# Altium PCB PCB1.pcbdoc
Units mil, origin at the board's own origin, x right, y up, seen from the top; angles counter-clockwise.
Board outline 5600 x 5600 mil, 2 copper layers (Top Layer, Bottom Layer); 53 components, 12 nets, 125 pads, 10 vias.
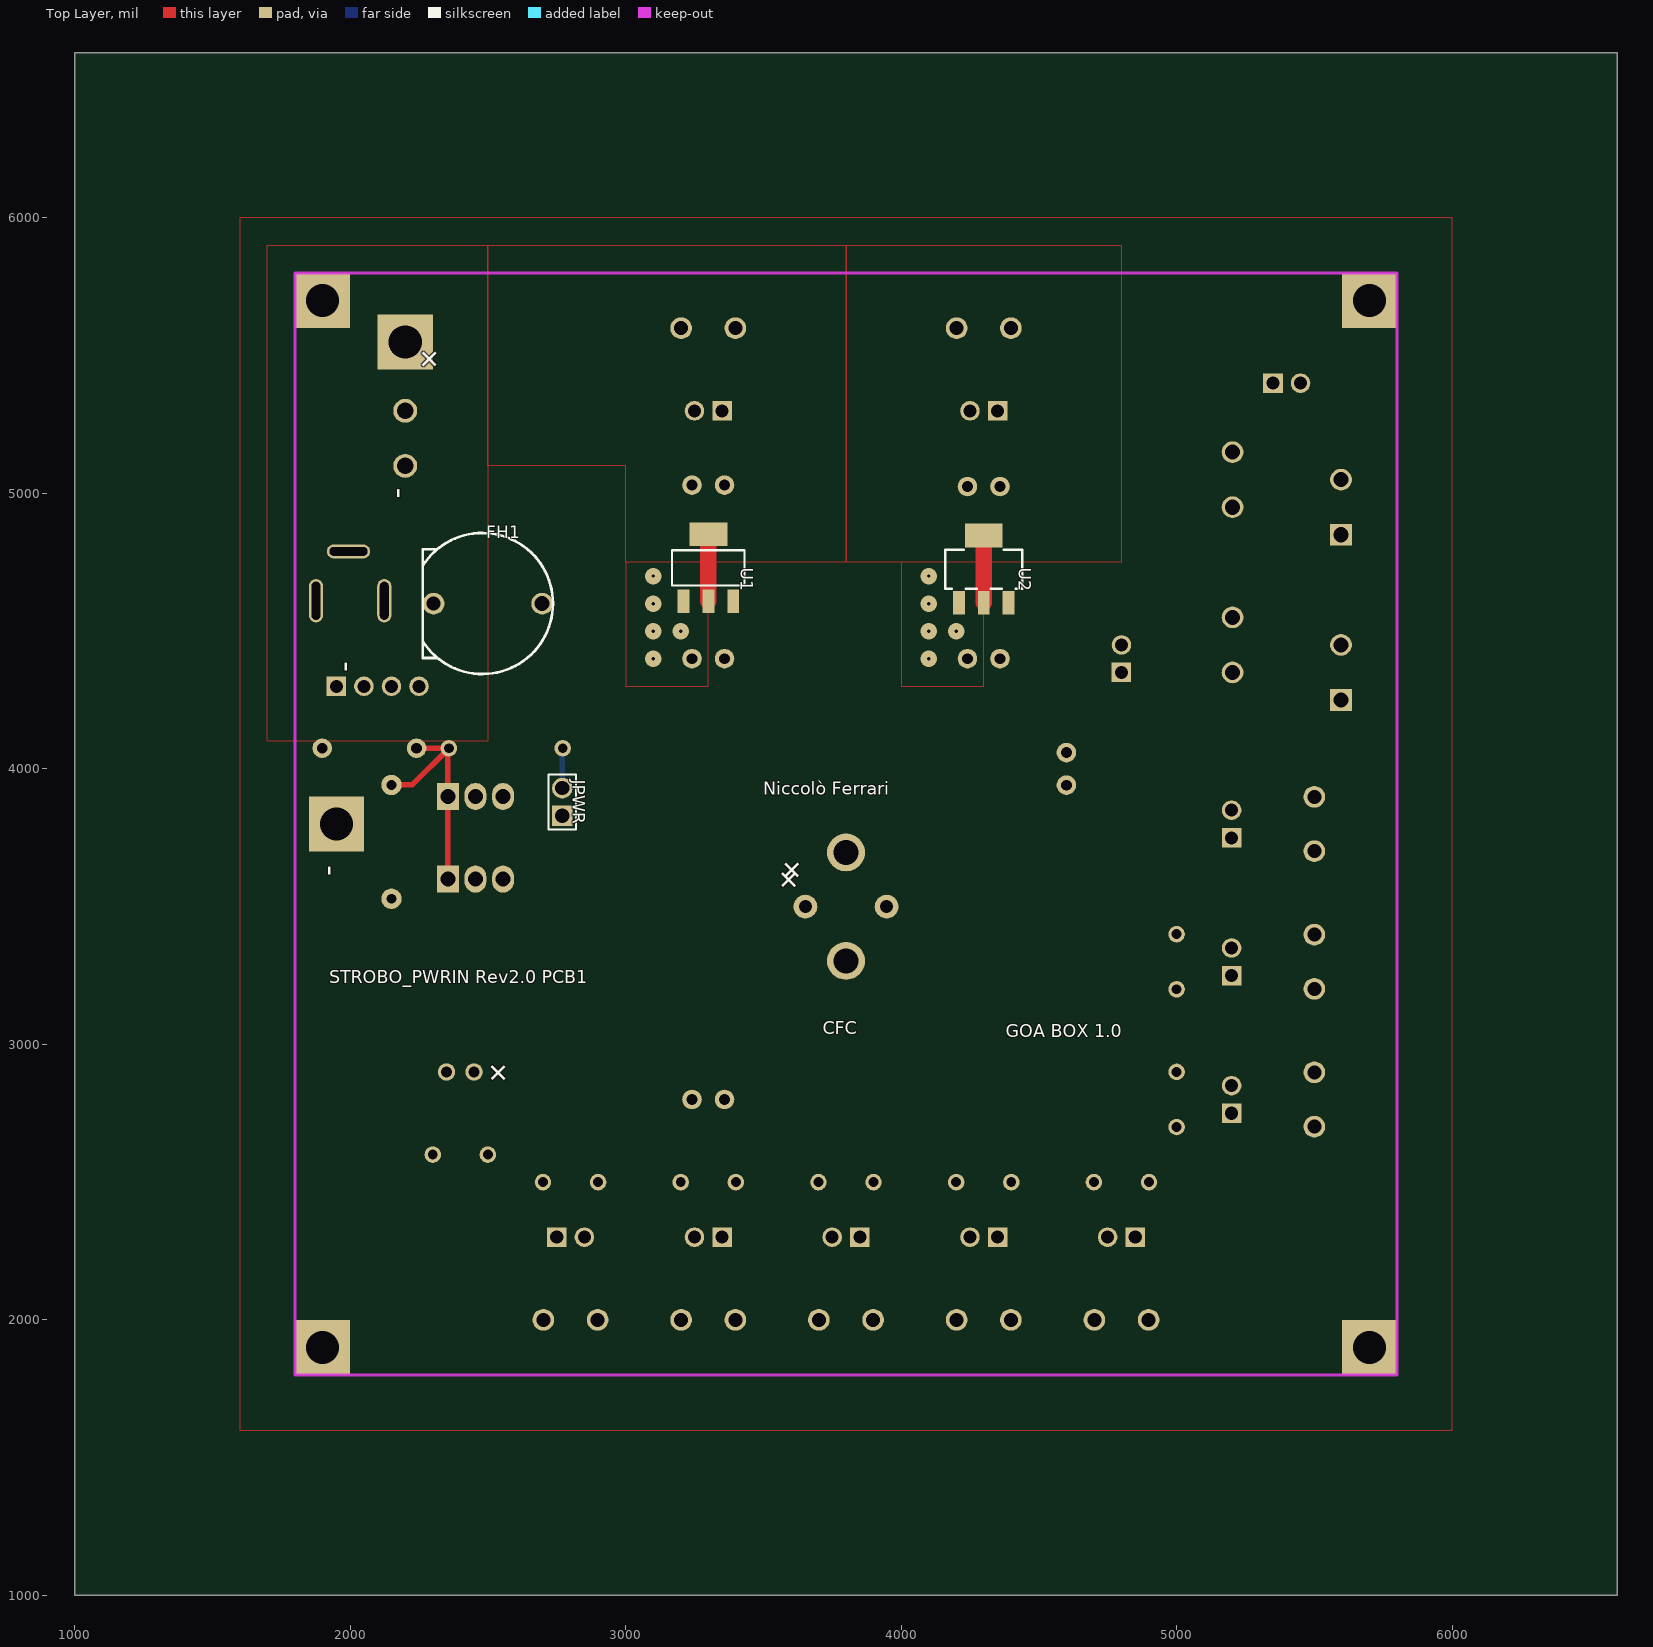
[diagram p0: Top Layer view]
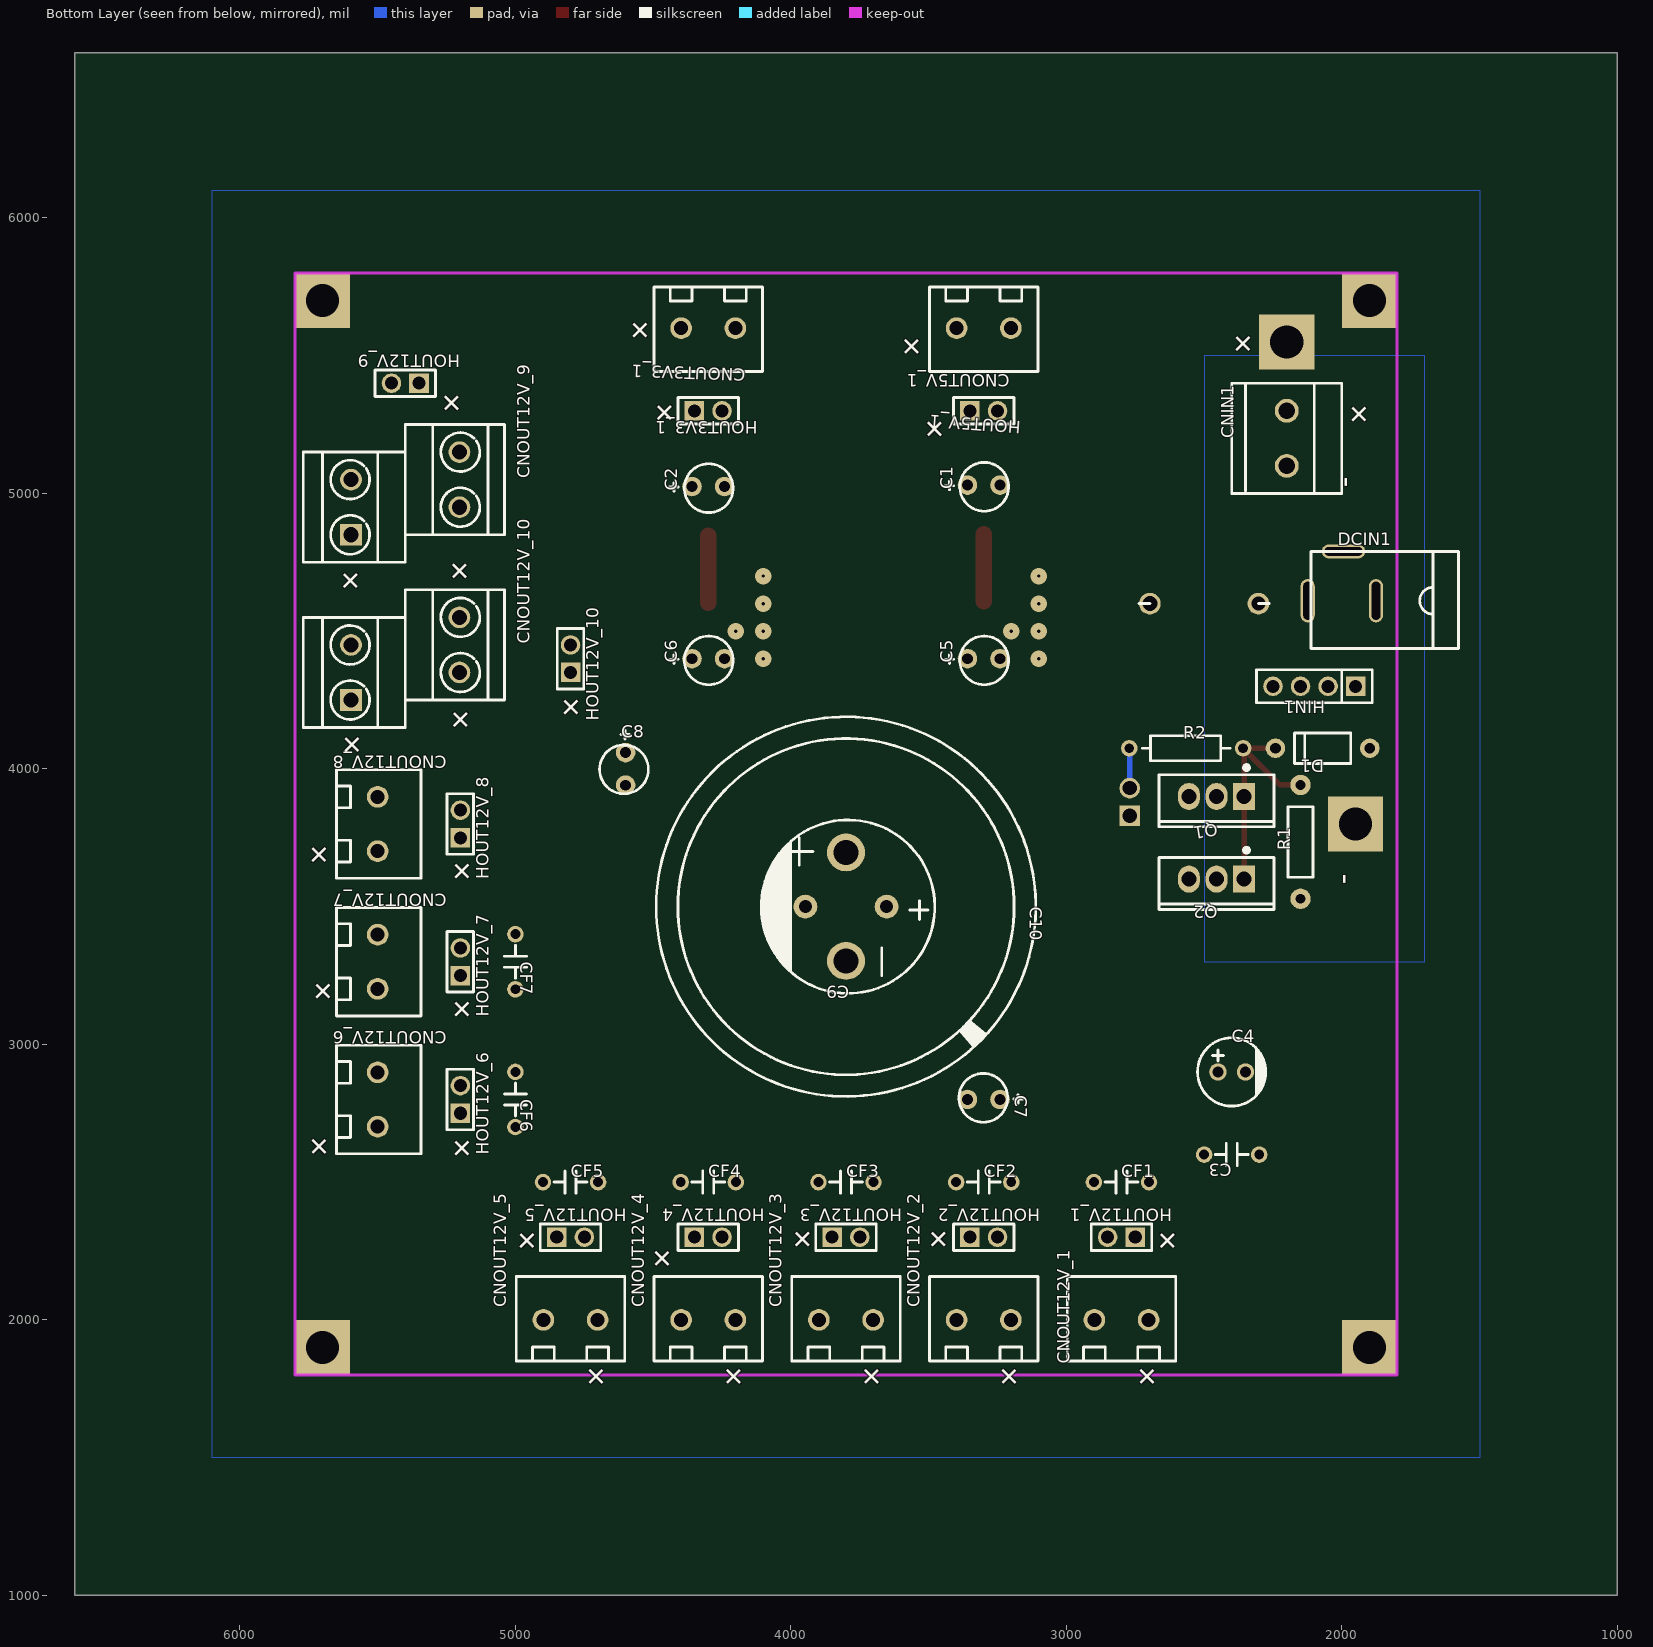
[diagram p1: Bottom Layer view, seen from below]

## Layer stack, top to bottom
Top Layer: signal copper (thickness not stored)
Dielectric: dielectric 12.6, FR-4, Dk 4.8
Bottom Layer: signal copper (thickness not stored)

## Board outline
6600,1000 1000,1000 1000,6600 6600,6600

## Components (designator, comment, footprint, x,y, rotation, side; value= is the part's Value field where it differs from the comment)
C1 "10uF" CAP-TAN-S2.5 3300,5030 r270 bottom
C2 "10uF" CAP-TAN-S2.5 4300,5025 r270 bottom
C3 "2.2uF" CAP-0.2 2400,2600 r180 bottom
C4 "100uF" CAP-TH_BD6.3-P2.50-D1.0-FD 2400,2900 r0 bottom
C5 "10uF" CAP-TAN-S2.5 3300,4400 r270 bottom
C6 "10uF" CAP-TAN-S2.5 4300,4400 r270 bottom
C7 "10uF" CAP-TAN-S2.5 3300,2800 r90 bottom
C8 "10uF" CAP-TAN-S2.5 4600,4000 r0 bottom
C9 "4700uF" CAP-TH_BD16.0-P7.50-D1.2-FD 3800,3500 r180 bottom
C10 "22000uF" CAP-TH_BD35.0-P10.00-D2.3-FD 3800,3500 r90 bottom
CF1 "1uF" CAP-0.2 2800,2500 r0 bottom
CF2 "1uF" CAP-0.2 3300,2500 r0 bottom
CF3 "1uF" CAP-0.2 3800,2500 r0 bottom
CF4 "1uF" CAP-0.2 4300,2500 r0 bottom
CF5 "1uF" CAP-0.2 4800,2500 r0 bottom
CF6 "1uF" CAP-0.2 5000,2800 r90 bottom
CF7 "1uF" CAP-0.2 5000,3300 r90 bottom
CNIN1 "MKDSN1.5/2-5.08" MKDSN1.5/2-5.08 2200,5200 r270 bottom
CNOUT3V3_1 "WJ126V-5.0-2P" WJ126V-5.0-2P 4300,5600 r90 bottom
CNOUT5V_1 "WJ126V-5.0-2P" WJ126V-5.0-2P 3300,5600 r90 bottom
CNOUT12V_1 "WJ126V-5.0-2P" WJ126V-5.0-2P 2800,2000 r270 bottom
CNOUT12V_2 "WJ126V-5.0-2P" WJ126V-5.0-2P 3300,2000 r270 bottom
CNOUT12V_3 "WJ126V-5.0-2P" WJ126V-5.0-2P 3800,2000 r270 bottom
CNOUT12V_4 "WJ126V-5.0-2P" WJ126V-5.0-2P 4300,2000 r270 bottom
CNOUT12V_5 "WJ126V-5.0-2P" WJ126V-5.0-2P 4800,2000 r270 bottom
CNOUT12V_6 "WJ126V-5.0-2P" WJ126V-5.0-2P 5500,2800 r0 bottom
CNOUT12V_7 "WJ126V-5.0-2P" WJ126V-5.0-2P 5500,3300 r0 bottom
CNOUT12V_8 "WJ126V-5.0-2P" WJ126V-5.0-2P 5500,3800 r0 bottom
CNOUT12V_9 "EELK508V-04P" EELK508V-04P 5400,5000 r270 bottom
CNOUT12V_10 "EELK508V-04P" EELK508V-04P 5400,4400 r270 bottom
D1 "TC1N4742ATB" DO-41_BD2.4-L4.7-P8.70-D0.9-FD 2070,4075 r180 bottom
DCIN1 "DC005-2.0MM" DC-5020 2000,4700 r180 bottom
FH1 "Fuse-holder - C268208" "FUSE-HOLDER- C268208" 2500,4600 r0 top
HIN1 "Header-Male-2.54_1x4" DIP-1X4P-2.54MM-M 2100,4300 r180 bottom
HOUT3V3_1 "MTP125-1102S1" HDR-TH_2P-P2.54-V_A2541HWV-2P 4300,5300 r0 bottom
HOUT5V_1 "MTP125-1102S1" HDR-TH_2P-P2.54-V_A2541HWV-2P 3300,5300 r0 bottom
HOUT12V_1 "MTP125-1102S1" HDR-TH_2P-P2.54-V_A2541HWV-2P 2800,2300 r180 bottom
HOUT12V_2 "MTP125-1102S1" HDR-TH_2P-P2.54-V_A2541HWV-2P 3300,2300 r0 bottom
HOUT12V_3 "MTP125-1102S1" HDR-TH_2P-P2.54-V_A2541HWV-2P 3800,2300 r0 bottom
HOUT12V_4 "MTP125-1102S1" HDR-TH_2P-P2.54-V_A2541HWV-2P 4300,2300 r0 bottom
HOUT12V_5 "MTP125-1102S1" HDR-TH_2P-P2.54-V_A2541HWV-2P 4800,2300 r0 bottom
HOUT12V_6 "MTP125-1102S1" HDR-TH_2P-P2.54-V_A2541HWV-2P 5200,2800 r270 bottom
HOUT12V_7 "MTP125-1102S1" HDR-TH_2P-P2.54-V_A2541HWV-2P 5200,3300 r270 bottom
HOUT12V_8 "MTP125-1102S1" HDR-TH_2P-P2.54-V_A2541HWV-2P 5200,3800 r270 bottom
HOUT12V_9 "MTP125-1102S1" HDR-TH_2P-P2.54-V_A2541HWV-2P 5400,5400 r180 bottom
HOUT12V_10 "MTP125-1102S1" HDR-TH_2P-P2.54-V_A2541HWV-2P 4800,4400 r270 bottom
JPWR "Header-Male-2.54_1x2" HDR-2X1/2.54 2770,3880 r180 top
Q1 "IRFB7430PBF" TO-220-3_L10.0-W4.5-P2.54-L 2455,3900 r180 bottom
Q2 "IRFB7430PBF" TO-220-3_L10.0-W4.5-P2.54-L 2455,3600 r180 bottom
R1 "240K" RES-TH_BD2.3-L6.5-P10.50-D0.5 2150,3735 r270 bottom
R2 "47K" RES-TH_BD2.2-L6.5-P10.50-D0.6 2565,4075 r180 bottom
U1 "NCP1117ST50T3G" SOT-223_L6.5-W3.5-P2.30-LS7.0-BR 3300,4730 r270 top
U2 "NCP1117ST33T3G" SOT-223-3_L6.5-W3.4-P2.30-LS7.0-BR 4300,4725 r270 top

## Footprints (in the part's own frame and the unit in brackets; to place one, negate y for a bottom-side part, rotate by r counter-clockwise, add the part's x,y. Pads: shape width x height; smd on the part's side, far side on the other; paste and mask are expansions set on the pad)
CAP-0.2 [mil]
  round 60 hole 36: 1(100,0) 2(-100,0)
  silkscreen extent -60,-40 60,40
CAP-TAN-S2.5 [mm]
  round 1.8 hole 1: 1(0,-1.5) 2(0,1.5)
  silkscreen extent -2.1,-3.6 2.4,2.29
CAP-TH_BD6.3-P2.50-D1.0-FD [mm]
  round 1.6 hole 1: 1(1.27,0) 2(-1.27,0)
  silkscreen extent -3.17,-3.15 3.15,3.15
CAP-TH_BD16.0-P7.50-D1.2-FD [mm]
  round 2.2 hole 1.2: 1(3.75,0) 2(-3.75,0)
  silkscreen extent -7.81,-8 8.19,8
CAP-TH_BD35.0-P10.00-D2.3-FD [mm]
  round 3.5 hole 2.3: 1(5,0) 2(-5,0)
  silkscreen extent -17.5,-17.5 17.5,17.5
DC-5020 [mm]
  oval 1.3x3.999 hole 0.8 slot 3.5 at 90 deg: 1(-3.15,-2.275) 2(3.15,-2.275)
  oval 3.999x1.3 hole 0.8 slot 3.5 at 0 deg: 3(0.15,2.275)
  silkscreen extent -2.85,-6.67 10.75,2.28
DIP-1X4P-2.54MM-M [mm]
  rect 1.8x1.8 hole 1.2: 1(3.81,0)
  round 1.8 hole 1.2: 2(1.27,0) 3(-1.27,0) 4(-3.81,0)
  silkscreen extent -5.33,-1.52 5.33,1.52
DO-41_BD2.4-L4.7-P8.70-D0.9-FD [mm]
  round 1.8 hole 1: 1(4.35,0) 2(-4.35,0)
  silkscreen extent -2.6,-1.4 2.6,1.4
EELK508V-04P [mm]
  rect 2x2 hole 1.4: 1(3.81,-5)
  round 2 hole 1.4: 2(1.27,5) 3(-1.27,-5) 4(-3.81,5)
  silkscreen extent -6.35,-9.4 6.35,9.14
"FUSE-HOLDER- C268208" [mm]
  round 2 hole 1.3: 1(-5.005,0)
  round 2 hole 1.4: 2(5.005,0)
  silkscreen extent -6.01,-6.49 6,6.51
HDR-2X1/2.54 [mm]
  rect 1.9x1.9 hole 1.3: 1(0,1.27)
  round 1.9 hole 1.3: 2(0,-1.27)
  silkscreen extent -1.27,-2.54 1.27,2.54
HDR-TH_2P-P2.54-V_A2541HWV-2P [mm]
  rect 1.8x1.8 hole 1.2: 1(1.27,0)
  round 1.8 hole 1.2: 2(-1.27,0)
  silkscreen extent -2.79,-1.22 2.79,1.22
MKDSN1.5/2-5.08 [mm]
  round 2.2 hole 1.5: 1(2.54,0) 2(-2.54,0)
  silkscreen extent -5.08,-5.08 5.08,5.08
RES-TH_BD2.2-L6.5-P10.50-D0.6 [mil]
  round 60 hole 36: 1(206.69,0) 2(-206.69,0)
  silkscreen extent -160,-45 160,45
RES-TH_BD2.3-L6.5-P10.50-D0.5 [mil]
  round 74 hole 35.4: 1(206.69,0) 2(-206.69,0)
  silkscreen extent -128,-45 128,45
SOT-223-3_L6.5-W3.4-P2.30-LS7.0-BR [mm]
  rect 2.2x1.1 smd: 1(3.099,-2.3) 2(3.099,0) 3(3.099,2.3)
  rect 2.2x3.5 smd: 4(-3.099,0)
  silkscreen extent -1.8,-3.55 1.8,3.55
SOT-223_L6.5-W3.5-P2.30-LS7.0-BR [mil]
  rect 85x43 smd: 1(122,-90.5) 2(122,0.5) 3(122,90.5)
  rect 85x138 smd: 4(-122,0.5)
  silkscreen extent -64,-132 64,132
TO-220-3_L10.0-W4.5-P2.54-L [mm]
  rect 2.002x2.499 hole 1.4: 1(2.54,0)
  oval 2x2.5 hole 1.4: 2(0,0) 3(-2.54,0)
  silkscreen extent -5.3,-2.8 5.3,2.86
WJ126V-5.0-2P [mm]
  round 2 hole 1.3: 1(0,-2.501) 2(0,2.501)
  silkscreen extent -4,-5 3.8,5

## Free pads (board coordinates)
  rect 200x200 hole 120: 1(1900,1900) 1(1900,5700) 1(1950,3800) 1(2200,5550) 1(5700,1900) 1(5700,5700)

## Via types
v1: diameter 60, hole 12, Top Layer to Bottom Layer, 10 vias

## Nets (pads, with @x,y where several pads share a name; then routed paths per layer and width w, separated by ;. In a path a pad name is that pad's centre, name@x,y a point inside that pad or via, vN(x,y) a via of type N, cw(c..) or ccw(c..) an arc to the next point about the centre after c; other vN are vias at no path point)
+3V3: C2.1 CNOUT3V3_1.2 HOUT3V3_1.1 U2.2 U2.4 | length 244
  Top Layer w60: U2.2 U2.4
+5V: C1.1 CNOUT5V_1.2 HOUT5V_1.1 U1.2 U1.4 | length 244
  Top Layer w60: U1.2 U1.4
GND: C1.2 C2.2 C3.1 C4.2 C5.2 C6.2 C7.2 C8.2 C9.2 C10.2 CF1.1 CF2.1 CF3.1 CF4.1 CF5.1 CF6.1 CF7.1 CNOUT3V3_1.1 CNOUT5V_1.1 CNOUT12V_1.1 CNOUT12V_2.1 CNOUT12V_3.1 CNOUT12V_4.1 CNOUT12V_5.1 CNOUT12V_6.1 CNOUT12V_7.1 CNOUT12V_8.1 CNOUT12V_9.3 CNOUT12V_9.4 CNOUT12V_10.3 CNOUT12V_10.4 HOUT3V3_1.2 HOUT5V_1.2 HOUT12V_1.2 HOUT12V_2.2 HOUT12V_3.2 HOUT12V_4.2 HOUT12V_5.2 HOUT12V_6.2 HOUT12V_7.2 HOUT12V_8.2 HOUT12V_9.2 HOUT12V_10.2 pad.1@1900,1900 pad.1@1900,5700 pad.1@5700,1900 pad.1@5700,5700 Q1.3 Q2.3 U1.1 U2.1
  other v1: 3100,4400 4100,4400 3100,4500 3200,4500 4100,4500 4200,4500 3100,4600 4100,4600 3100,4700 4100,4700
JPWR_2: JPWR.2 R2.2 | length 145.7
  Bottom Layer w20: JPWR.2 2770,4073.3 R2.2
Q1_1: D1.2 Q1.1 Q2.1 R1.2 R2.1 | length 856.9
  Top Layer w20: R1.2 2225,3941.69 R2.1 ; D1.2 R2.1 ; Q2.1 Q1.1 2355,4071.69 R2.1
S$15: 
S$17: 
S$46: 
S$48: 
VCC: C3.2 C4.1 C5.1 C6.1 C7.1 C8.1 C9.1 C10.1 CF1.2 CF2.2 CF3.2 CF4.2 CF5.2 CF6.2 CF7.2 CNOUT12V_1.2 CNOUT12V_2.2 CNOUT12V_3.2 CNOUT12V_4.2 CNOUT12V_5.2 CNOUT12V_6.2 CNOUT12V_7.2 CNOUT12V_8.2 CNOUT12V_9.1 CNOUT12V_9.2 CNOUT12V_10.1 CNOUT12V_10.2 FH1.2 HOUT12V_1.1 HOUT12V_2.1 HOUT12V_3.1 HOUT12V_4.1 HOUT12V_5.1 HOUT12V_6.1 HOUT12V_7.1 HOUT12V_8.1 HOUT12V_9.1 HOUT12V_10.1 JPWR.1 U1.3 U2.3
VIN+: CNIN1.2 DCIN1.1 FH1.1 HIN1.3 HIN1.4 pad.1@2200,5550
VIN-: CNIN1.1 D1.1 DCIN1.2 DCIN1.3 HIN1.1 HIN1.2 pad.1@1950,3800 Q1.2 Q2.2 R1.1

## Polygon pours and split planes (outlines as drawn)
GND on Bottom Layer (solid): 1500,6100 1500,1500 6100,1500 6100,6100
VIN- on Bottom Layer (solid): 1700,5500 2500,5500 2500,3300 1700,3300
VCC on Top Layer (solid): 1600,6000 1600,1600 6000,1600 6000,6000
GND on Top Layer (solid): 4000,4750 4000,4300 4300,4300 4300,4750
GND on Top Layer (solid): 3000,4750 3000,4300 3300,4300 3300,4750
+3V3 on Top Layer (solid): 3800,5900 4800,5900 4800,4750 3800,4750
VIN+ on Top Layer (solid): 1700,5900 2500,5900 2500,4100 1700,4100
+5V on Top Layer (solid): 2500,5100 2500,5900 3800,5900 3800,4750 3000,4750 3000,5100 2500,5100

## Silkscreen, mask and mechanical layers (free items; w line width, h text height)
Top Overlay:
  text "+" at 2296.72,5543.28 h80 r225
  text "-" at 2205,4980 h80 r90
  text "-" at 2015,4350 h80 r90
  text "Niccolò Ferrari" at 3500,3890 h80
  text "+" at 3611.72,3688.28 h80 r225
  text "-" at 1955,3610 h80 r90
  text "+" at 3648.28,3588.28 h80 r135
  text "STROBO_PWRIN Rev2.0 PCB1" at 1925,3205 h80
  text "CFC" at 3715,3020 h80
  text "GOA BOX 1.0" at 4380,3010 h80
  text "+" at 2593.28,2888.28 h80 r135
Bottom Overlay:
  text "+" at 3618.28,5541.72 h80 r45
  text "+" at 4556.72,5536.72 h80 r315
  text "+" at 2366.72,5486.72 h80 r315
  text "+" at 5288.28,5336.72 h80 r45
  text "+" at 3533.28,5241.72 h80 r45
  text "+" at 4466.72,5236.72 h80 r315
  text "+" at 1946.72,5231.72 h80 r315
  text "-" at 2015,5060 h80 r90
  text "+" at 5258.28,4726.72 h80 r45
  text "+" at 5606.72,4626.72 h80 r315
  text "+" at 4806.72,4166.72 h80 r315
  text "+" at 5206.72,4121.72 h80 r315
  text "+" at 5601.72,4031.72 h80 r315
  text "+" at 5721.72,3631.72 h80 r315
  text "-" at 2020,3620 h80 r90
  text "+" at 5201.72,3571.72 h80 r315
  text "+" at 5706.72,3136.72 h80 r315
  text "+" at 5201.72,3071.72 h80 r315
  text "+" at 5768.28,2636.72 h80 r45
  text "+" at 5201.72,2566.72 h80 r315
  text "+" at 3471.72,2236.72 h80 r315
  text "+" at 3966.72,2236.72 h80 r315
  text "+" at 2641.72,2231.72 h80 r315
  text "+" at 4523.28,2231.72 h80 r45
  text "+" at 4966.72,2231.72 h80 r315
  text "+" at 2763.28,1801.72 h80 r45
  text "+" at 3263.28,1801.72 h80 r45
  text "+" at 3763.28,1801.72 h80 r45
  text "+" at 4263.28,1801.72 h80 r45
  text "+" at 4763.28,1801.72 h80 r45
Document:
  lines w0.1: 3799,3799 3801,3801